# EAGLE board ATMega328-Nrf-1.0 (EAGLE 6.4)
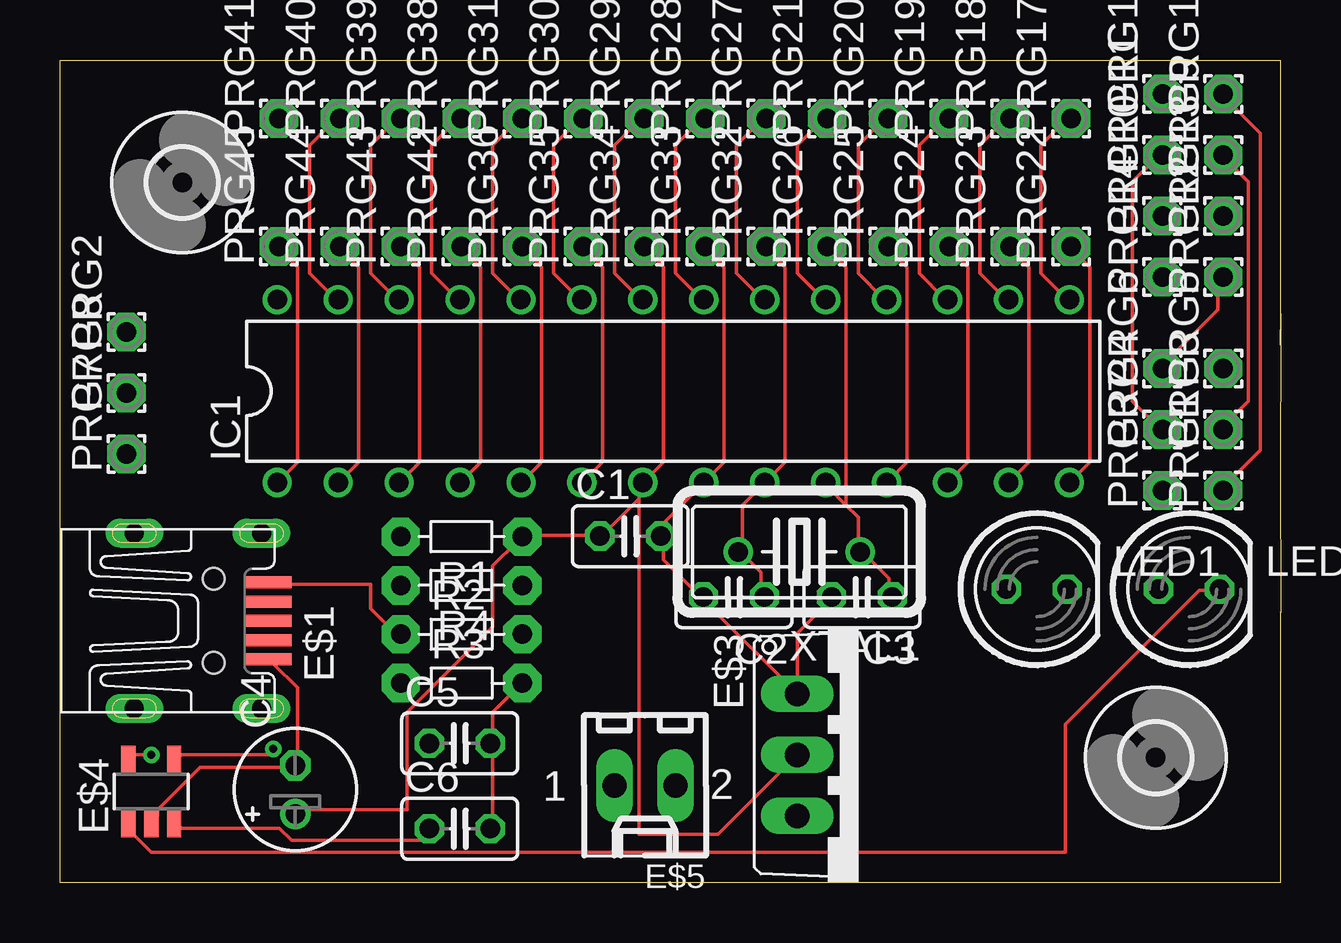
[diagram p0: board, top side]
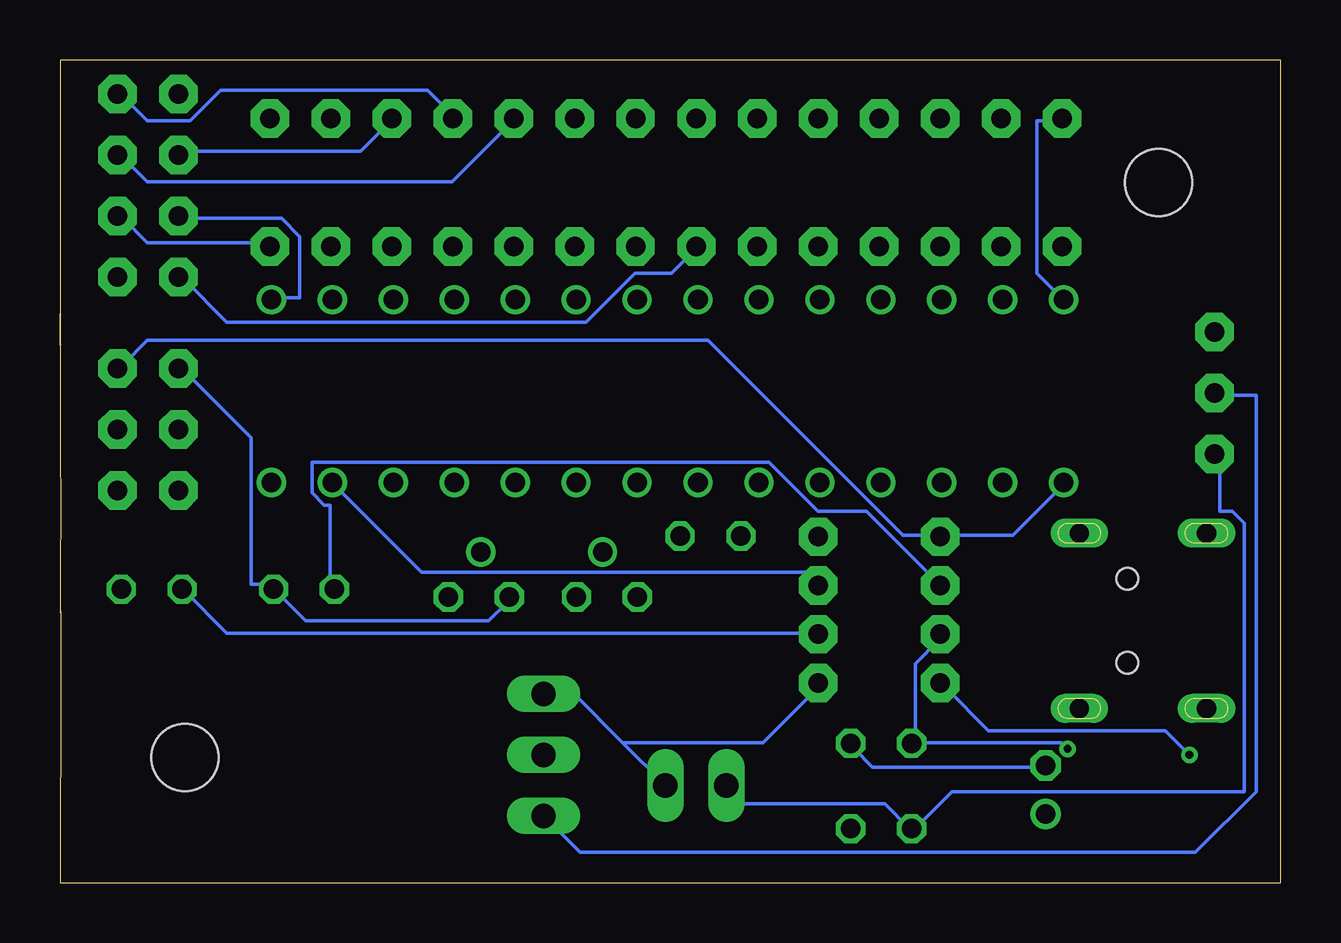
[diagram p1: board, bottom side, seen from below]

Size 50.89 x 34.29 mm. Coordinates in mm from the lower left corner, seen from the top.
Outline: 0,0 0,20.43 0.01,20.46 0.01,22.51 0,23.6 0,34.29 50.87,34.29 50.87,22.4 50.88,23.72 50.89,20.7 50.87,19.39 50.86,14.34 50.88,14.29 50.88,11.25 50.86,11.3 50.86,8.78 50.87,0 0,0
Copper layers (1*16): Top 0.0356mm / dielectric 1.5011mm / Bottom 0.0356mm
Design rules "LaenPCBOrder": minimum track width 6mil, minimum drill 13mil, track to track 6mil, track to pad 6mil, pad to pad 6mil, via to via 6mil, smd to smd 6mil, copper to edge 15mil, drill to drill 6mil, minimum pad ring 7mil, minimum via ring 7mil, stop-mask expansion 4mil, vias tented up to drill 0mil, thermal gap 10mil

## Footprints (pad centres in the part's own frame; a part is rotated, then mirrored left to right if it is on the bottom)
C025-025X050 = drill 0.813 octagon: 1 -1.27,0; 2 1.27,0
E2-5 = drill 0.813 pad 1.27: + -1.016,0 | drill 0.813 pad 1.27 octagon: - 1.016,0
UX60-MB-5S8 = smd 2 x 0.5: 1 8.65,1.6; 2 8.65,0.8; 3 8.65,0; 4 8.65,-0.8; 5 8.65,-1.6 | drill 0.8 long: M1 3.1,-3.65; M2 3.1,3.65; M3 8.4,3.65; M4 8.4,-3.65 | hole 0.9: 6.4,-1.75; 6.4,1.75
2,8 = hole 2.8: 0,0
TO220V = drill 1.016 long: 1 -2.54,-2.54; 2 0,-2.54; 3 2.54,-2.54
SOT23-5 = smd 0.6 x 1.2: 1 -0.95,-1.306; 2 0,-1.306; 3 0.95,-1.306; 4 0.95,1.306; 5 -0.95,1.306
6410-02 = drill 1.016 long: 1 1.27,0; 2 -1.27,0
PDIP-T28 = drill 0.813 pad 1.2: 1 -16.51,-3.81; 2 -13.97,-3.81; 3 -11.43,-3.81; 4 -8.89,-3.81; 5 -6.35,-3.81; 6 -3.81,-3.81; 7 -1.27,-3.81; 8 1.27,-3.81; 9 3.81,-3.81; 10 6.35,-3.81; 11 8.89,-3.81; 12 11.43,-3.81; 13 13.97,-3.81; 14 16.51,-3.81; 15 16.51,3.81; 16 13.97,3.81; 17 11.43,3.81; 18 8.89,3.81; 19 6.35,3.81; 20 3.81,3.81; 21 1.27,3.81; 22 -1.27,3.81; 23 -3.81,3.81; 24 -6.35,3.81; 25 -8.89,3.81; 26 -11.43,3.81; 27 -13.97,3.81; 28 -16.51,3.81
LED5MM = drill 0.813 octagon: A -1.27,0; K 1.27,0
1,6/0,8 = drill 0.813 pad 1.6 octagon: 1 0,0
R-5 = drill 0.813 pad 1.6 octagon: 1 -2.54,0; 2 2.54,0
HC18U-V = drill 0.813: 1 -2.54,0; 2 2.54,0

## Placement (x,y rotation side)
C1  [C025-025X050]  23.77,14.45 0 top
C2  [C025-025X050]  28.09,11.91 180 top
C3  [C025-025X050]  33.43,11.91 180 top
C4  [E2-5]  9.8,3.89 90 top
C5  [C025-025X050]  16.66,5.82 0 top
C6  [C025-025X050]  16.66,2.26 0 top
E$1  [UX60-MB-5S8]  0,10.92 0 top
E$2  [2,8]  5.1,29.18 0 top
E$3  [TO220V]  33.27,5.33 270 top
E$4  [SOT23-5]  3.81,3.81 0 top
E$5  [6410-02]  24.38,4.06 180 top
E$14  [2,8]  45.68,5.22 0 top
IC1  [PDIP-T28]  25.57,20.49 0 top
LED1  [LED5MM]  40.72,12.24 0 top
LED2  [LED5MM]  47.07,12.24 0 top
PRG1  [1,6/0,8]  48.49,16.36 90 top
PRG2  [1,6/0,8]  2.77,22.96 90 top
PRG3  [1,6/0,8]  48.49,18.9 90 top
PRG4  [1,6/0,8]  45.95,18.9 90 top
PRG5  [1,6/0,8]  48.49,21.44 90 top
PRG6  [1,6/0,8]  45.95,21.44 90 top
PRG7  [1,6/0,8]  2.77,17.88 90 top
PRG8  [1,6/0,8]  2.77,20.42 90 top
PRG9  [1,6/0,8]  48.49,30.33 90 top
PRG10  [1,6/0,8]  45.95,27.79 90 top
PRG11  [1,6/0,8]  45.95,30.33 90 top
PRG12  [1,6/0,8]  48.49,25.25 90 top
PRG13  [1,6/0,8]  48.49,27.79 90 top
PRG14  [1,6/0,8]  45.95,25.25 90 top
PRG15  [1,6/0,8]  48.49,32.87 90 top
PRG16  [1,6/0,8]  45.95,32.87 90 top
PRG17  [1,6/0,8]  42.14,31.85 90 top
PRG18  [1,6/0,8]  39.6,31.85 90 top
PRG19  [1,6/0,8]  37.06,31.85 90 top
PRG20  [1,6/0,8]  34.52,31.85 90 top
PRG21  [1,6/0,8]  31.98,31.85 90 top
PRG22  [1,6/0,8]  42.14,26.52 90 top
PRG23  [1,6/0,8]  39.6,26.52 90 top
PRG24  [1,6/0,8]  37.06,26.52 90 top
PRG25  [1,6/0,8]  34.52,26.52 90 top
PRG26  [1,6/0,8]  31.98,26.52 90 top
PRG27  [1,6/0,8]  29.44,31.85 90 top
PRG28  [1,6/0,8]  26.9,31.85 90 top
PRG29  [1,6/0,8]  24.36,31.85 90 top
PRG30  [1,6/0,8]  21.82,31.85 90 top
PRG31  [1,6/0,8]  19.28,31.85 90 top
PRG32  [1,6/0,8]  29.44,26.52 90 top
PRG33  [1,6/0,8]  26.9,26.52 90 top
PRG34  [1,6/0,8]  24.36,26.52 90 top
PRG35  [1,6/0,8]  21.82,26.52 90 top
PRG36  [1,6/0,8]  19.28,26.52 90 top
PRG37  [1,6/0,8]  45.95,16.36 90 top
PRG38  [1,6/0,8]  16.74,31.85 90 top
PRG39  [1,6/0,8]  14.2,31.85 90 top
PRG40  [1,6/0,8]  11.66,31.85 90 top
PRG41  [1,6/0,8]  9.12,31.85 90 top
PRG42  [1,6/0,8]  16.74,26.52 90 top
PRG43  [1,6/0,8]  14.2,26.52 90 top
PRG44  [1,6/0,8]  11.66,26.52 90 top
PRG45  [1,6/0,8]  9.12,26.52 90 top
R1  [R-5]  16.74,14.43 180 top
R2  [R-5]  16.74,10.36 0 top
R3  [R-5]  16.74,8.33 0 top
R4  [R-5]  16.74,12.4 180 top
XTAL1  [HC18U-V]  30.81,13.79 180 top

## Library data of the parts
C1-C3 C5 C6 = resistor
C4 = rcl
E$1 = con-hirose
E$2 E$14 = holes
E$3 E$4 = linear
E$5 = con-molex
IC1 = texas
LED1 LED2 = led
PRG1-PRG45 = wirepad
R1-R4 = discrete
XTAL1 = crystal

## Nets
S$2: C1.2 C2.2 C3.2 C4.- C5.2 C6.2 E$1.5 E$3.1 E$4.2 E$5.2 IC1.8 LED1.K PRG6.1 PRG12.1 PRG33.1 R3.2
S$3: E$4.1 LED2.K
S$4: IC1.26 PRG39.1
S$5: IC1.13 PRG23.1 R4.1
S$6: C2.1 IC1.9 PRG32.1 XTAL1.2
S$7: C3.1 IC1.10 PRG26.1 XTAL1.1
S$8: IC1.1 PRG5.1 PRG45.1 R1.2
S$9: IC1.16 PRG18.1
S$10: C1.1 C4.+ E$3.2 IC1.7 PRG14.1 PRG34.1 R1.1
S$11: IC1.15 PRG10.1 PRG17.1
S$14: IC1.14 PRG13.1 PRG22.1
S$16: IC1.4 PRG42.1
S$17: IC1.28 PRG41.1
S$18: IC1.5 PRG36.1
S$19: IC1.27 PRG40.1
S$20: E$3.3 PRG8.1
S$21: IC1.2 PRG44.1
S$22: LED1.A R4.2
S$23: IC1.3 PRG43.1
S$24: IC1.6 PRG35.1
S$25: IC1.11 PRG25.1
S$26: IC1.12 PRG24.1
S$27: IC1.25 PRG38.1
S$28: IC1.24 PRG31.1
S$29: IC1.23 PRG30.1
S$30: IC1.22 PRG29.1
S$31: IC1.21 PRG28.1
S$32: IC1.20 PRG27.1
S$33: LED2.A R2.2
S$35: C5.1 E$1.1 E$4.4 R2.1
S$36: E$4.5 R3.1
S$37: IC1.19 PRG3.1 PRG9.1 PRG21.1
S$38: IC1.17 PRG4.1 PRG11.1 PRG19.1
S$39: IC1.18 PRG1.1 PRG15.1 PRG20.1
S$43: C6.1 E$4.3 E$5.1 PRG7.1

## Tracks (layer width: path | path; a pad name or v marks a point on that pad's centre or on a via)
S$2
  Top 0.152: C6.2 18.03,2.29 18.03,5.59 C5.2 18.03,5.84 18.03,7.11 19.05,8.13 R3.2 | E$4.2 3.81,2.54 4.06,2.79 4.06,3.05 5.84,4.83 9.65,4.83 C4.- 9.91,5.08 9.91,8.13 8.89,9.14 E$1.5 | PRG33.1 26.92,26.42 27.69,25.65 27.69,17.53 26.92,16.76 IC1.8 26.67,16.51 25.15,14.99 25.15,14.48 C1.2 25.15,14.22 25.15,13.46 26.67,11.94 C2.2 26.92,11.68 E$3.1 30.73,10.41 32,11.68 C3.2 | PRG6.1 45.97,21.59 48.26,23.88 48.26,25.15 PRG12.1
  Bottom 0.152: C5.2 17.78,5.59 17.02,4.83 9.91,4.83 C4.- | C3.2 32.26,11.68 33.02,10.92 40.64,10.92 41.91,12.19 LED1.K 42.16,12.45 42.93,12.45 42.93,18.54 45.72,21.34 PRG6.1 | 27.43,5.84 29.46,7.87 E$3.1 | 27.43,5.84 E$5.2 | 27.43,5.84 21.59,5.84 19.3,8.13 R3.2
S$3
  Top 0.152: E$4.1 3.05,2.29 3.05,2.03 3.81,1.27 41.91,1.27 41.91,6.6 47.5,12.19 48.26,12.19 LED2.K
S$4
  Top 0.152: IC1.26 13.97,24.38 12.95,25.4 12.95,30.73 13.97,31.75 PRG39.1
S$5
  Top 0.152: IC1.13 39.62,16.76 40.39,17.53 40.39,25.65 39.62,26.42 PRG23.1
  Bottom 0.152: R4.1 19.3,12.45 19.81,12.95 35.81,12.95 39.37,16.51 IC1.13
S$6
  Top 0.152: C2.1 29.21,11.94 29.21,12.95 28.45,13.72 XTAL1.2 28.45,13.97 28.45,15.75 29.21,16.51 IC1.9 29.46,16.76 30.23,17.53 30.23,25.65 29.46,26.42 PRG32.1
S$7
  Top 0.152: C3.1 34.54,11.94 34.54,12.7 33.53,13.72 XTAL1.1 33.27,13.97 33.27,15.24 32.77,15.75 | 32.77,15.75 32,16.51 IC1.10 | 32.77,15.75 32.77,25.65 32,26.42 PRG26.1
S$8
  Top 0.152: PRG45.1 9.14,26.42 9.91,25.65 9.91,17.53 9.14,16.76 IC1.1
  Bottom 0.152: IC1.1 9.14,16.51 11.18,14.48 13.97,14.48 R1.2 14.22,14.48 15.75,14.48 23.88,22.61 47.24,22.61 48.26,21.59 PRG5.1
S$9
  Top 0.152: IC1.16 39.37,24.38 38.35,25.4 38.35,30.73 39.37,31.75 PRG18.1
S$10
  Top 0.152: C4.+ 9.91,3.05 14.48,3.05 14.48,7.11 18.03,10.67 18.03,13.21 19.05,14.22 R1.1 19.3,14.48 22.35,14.48 C1.1 22.61,14.48 24.13,16 | 24.13,16 24.13,16.51 IC1.7 24.38,16.76 25.15,17.53 25.15,25.65 24.38,26.42 PRG34.1 | E$3.2 27.43,2.03 24.13,2.03 24.13,16
  Bottom 0.152: PRG14.1 45.72,25.15 43.94,23.37 28.96,23.37 26.92,25.4 25.4,25.4 24.38,26.42 PRG34.1
S$11
  Top 0.152: IC1.15 41.91,24.38 40.89,25.4 40.89,30.73 41.91,31.75 PRG17.1
  Bottom 0.152: PRG10.1 45.72,27.69 41.66,27.69 40.89,26.92 40.89,24.38 41.91,24.38 IC1.15
S$14
  Top 0.152: IC1.14 42.16,16.76 42.93,17.53 42.93,25.65 42.16,26.42 PRG22.1
  Bottom 0.152: PRG13.1 48.26,27.69 47.24,26.67 42.16,26.67 PRG22.1
S$16
  Top 0.152: IC1.4 16.76,16.76 17.53,17.53 17.53,25.65 16.76,26.42 PRG42.1
S$17
  Bottom 0.152: IC1.28 9.14,24.38 10.16,25.4 10.16,31.75 9.14,31.75 PRG41.1
S$18
  Top 0.152: IC1.5 19.3,16.76 20.07,17.53 20.07,25.65 19.3,26.42 PRG36.1
S$19
  Top 0.152: IC1.27 11.43,24.38 10.41,25.4 10.41,30.73 11.43,31.75 PRG40.1
S$20
  Bottom 0.152: E$3.3 29.21,1.27 3.56,1.27 1.02,3.81 1.02,20.32 2.54,20.32 PRG8.1
S$21
  Top 0.152: IC1.2 11.68,16.76 12.45,17.53 12.45,25.65 11.68,26.42 PRG44.1
S$22
  Bottom 0.152: LED1.A 39.62,12.45 39.62,15.75 39.88,15.75 40.39,16.26 40.39,17.53 21.34,17.53 19.3,15.49 17.27,15.49 14.22,12.45 R4.2
S$23
  Top 0.152: IC1.3 14.22,16.76 14.99,17.53 14.99,25.65 14.22,26.42 PRG43.1
S$24
  Top 0.152: IC1.6 21.84,16.76 22.61,17.53 22.61,25.65 21.84,26.42 PRG35.1
S$25
  Top 0.152: IC1.11 34.54,16.76 35.31,17.53 35.31,25.65 34.54,26.42 PRG25.1
S$26
  Top 0.152: IC1.12 37.08,16.76 37.85,17.53 37.85,25.65 37.08,26.42 PRG24.1
S$27
  Top 0.152: IC1.25 16.51,24.38 15.49,25.4 15.49,30.73 16.51,31.75 PRG38.1
S$28
  Top 0.152: IC1.24 19.05,24.38 18.03,25.4 18.03,30.73 19.05,31.75 PRG31.1
S$29
  Top 0.152: IC1.23 21.59,24.38 20.57,25.4 20.57,30.73 21.59,31.75 PRG30.1
S$30
  Top 0.152: IC1.22 24.13,24.38 23.11,25.4 23.11,30.73 24.13,31.75 PRG29.1
S$31
  Top 0.152: IC1.21 26.67,24.38 25.65,25.4 25.65,30.73 26.67,31.75 PRG28.1
S$32
  Top 0.152: IC1.20 29.21,24.38 28.19,25.4 28.19,30.73 29.21,31.75 PRG27.1
S$33
  Bottom 0.152: LED2.A 45.72,12.19 43.94,10.41 19.3,10.41 R2.2
S$35  (via drill 0.33)
  Top 0.152: E$1.1 8.89,12.45 12.95,12.45 12.95,11.43 13.97,10.41 R2.1 | v8.89,5.59 8.89,5.33 4.83,5.33 E$4.4
  Bottom 0.152: v8.89,5.59 9.14,5.84 15.24,5.84 | 15.24,5.84 15.24,9.14 14.22,10.16 R2.1 | 15.24,5.84 C5.1
S$36  (via drill 0.33)
  Top 0.152: v3.81,5.33 3.05,5.33 E$4.5
  Bottom 0.152: v3.81,5.33 4.83,6.35 12.19,6.35 13.97,8.13 R3.1
S$37
  Top 0.152: IC1.19 31.75,24.38 30.73,25.4 30.73,30.73 31.75,31.75 PRG21.1 | PRG3.1 48.51,19.05 49.53,20.07 49.53,29.21 48.51,30.23 PRG9.1
  Bottom 0.152: PRG21.1 32,31.75 34.54,29.21 47.24,29.21 48.26,30.23 PRG9.1
S$38
  Top 0.152: IC1.17 36.83,24.38 35.81,25.4 35.81,30.73 36.83,31.75 PRG19.1 | PRG4.1 45.72,19.05 44.7,20.07 44.7,29.21 45.72,30.23 PRG11.1
  Bottom 0.152: PRG19.1 37.08,31.75 38.35,30.48 45.72,30.48 PRG11.1
S$39
  Top 0.152: IC1.18 34.29,24.38 33.27,25.4 33.27,30.73 34.29,31.75 PRG20.1 | PRG1.1 48.51,16.51 50.04,18.03 50.04,31.24 48.51,32.77 PRG15.1
  Bottom 0.152: PRG20.1 34.54,32 35.56,33.02 44.2,33.02 45.47,31.75 47.24,31.75 48.26,32.77 PRG15.1
S$43
  Top 0.152: E$4.3 4.83,2.29 9.14,2.29 9.65,1.78 15.24,1.78 15.24,2.03 C6.1
  Bottom 0.152: E$5.1 22.35,3.3 16.51,3.3 15.49,2.29 C6.1 15.24,2.29 13.72,3.81 1.52,3.81 1.52,14.99 2.03,15.49 2.54,15.49 2.54,17.78 PRG7.1

## Text on the board
tNames: NRF24 | ATmega328 | PWRSW | ICSP | 16MHz | 1 | 4.7K | 0.1uF | 330 | + | + | 330 | 22pF | 22pF | PD7 | CHG | 2K | + | 4.7uF | MCP73831 | 100uF | 4.7uF | VREG